# Altium PCB Booster2.PcbDoc (part 1 of 2)
Units mm, origin at the board's own origin, x right, y up, seen from the top; angles counter-clockwise.
Board outline 59.06 x 72.51 mm, 2 copper layers (Top Layer, Bottom Layer); 66 components, 45 nets, 178 pads, 206 vias.
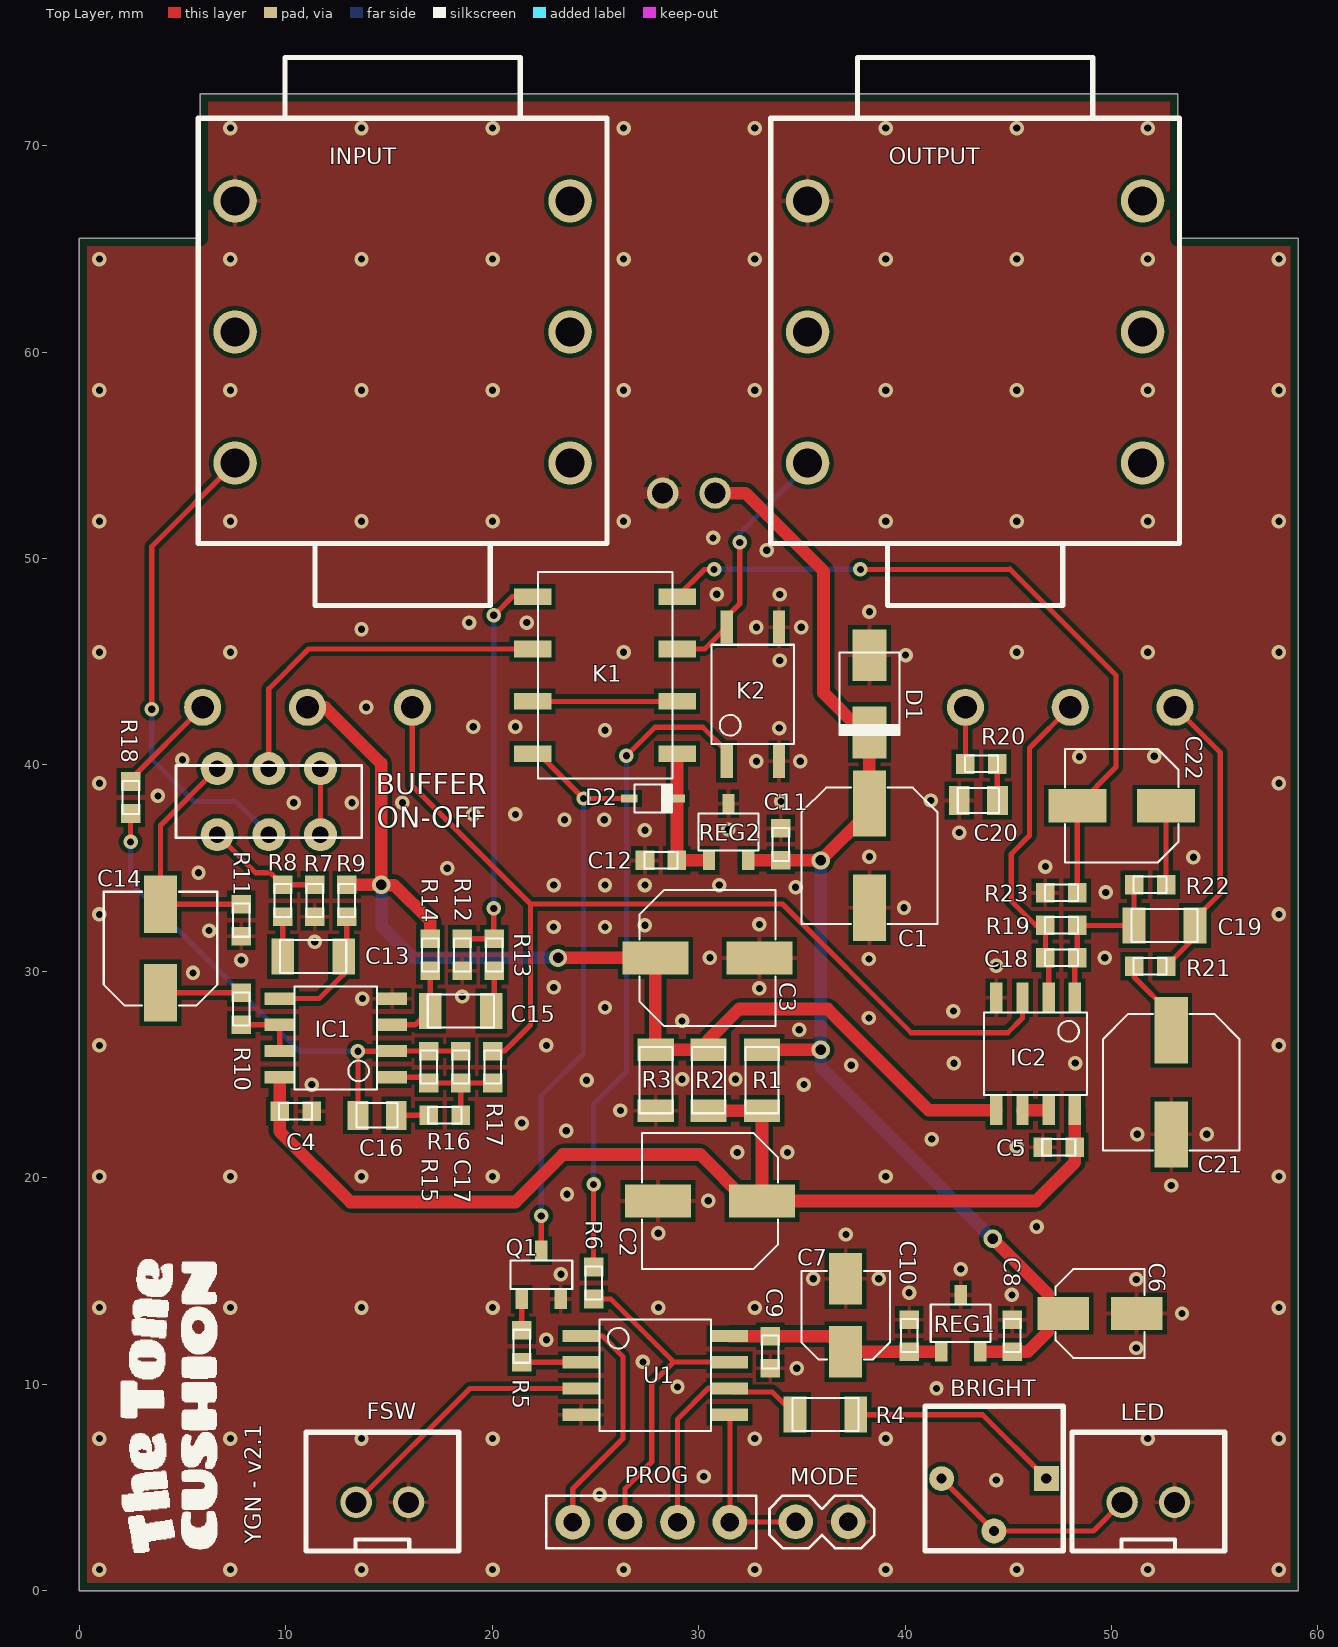
[diagram p0: Top Layer view]
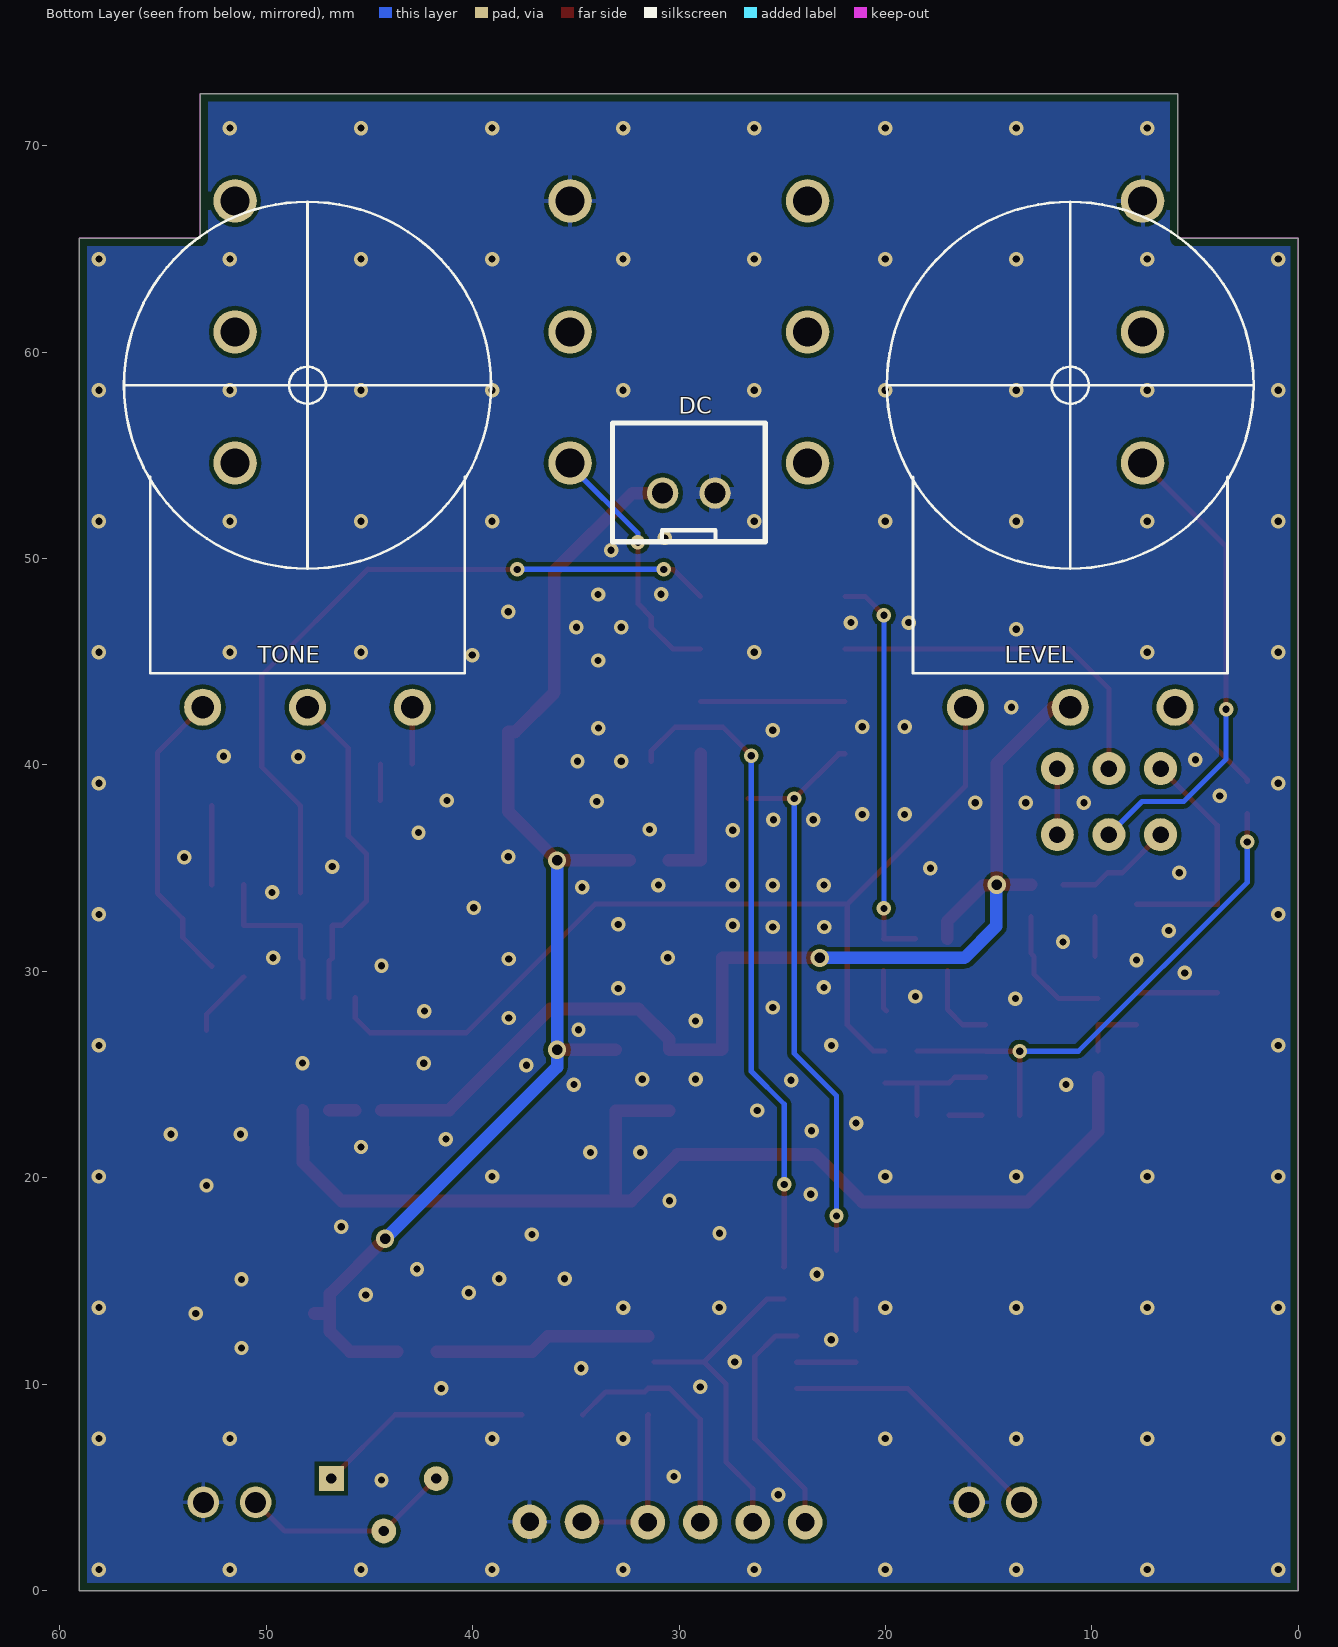
[diagram p1: Bottom Layer view, seen from below]
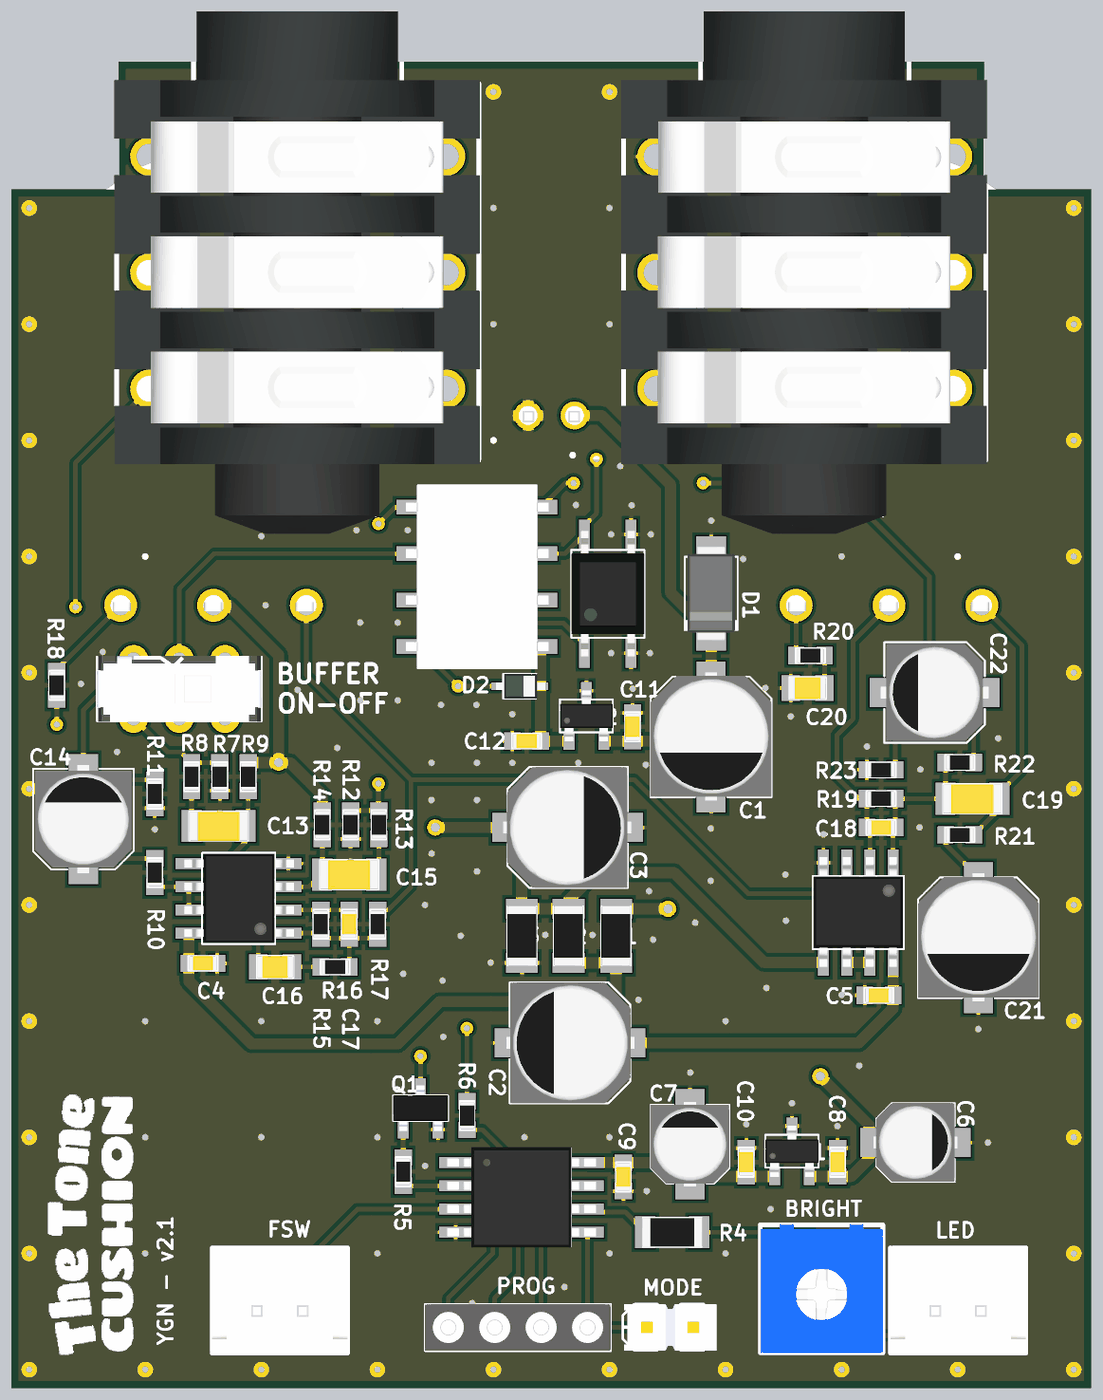
[diagram p2: 3D render of the assembled board from above, using the file's embedded part models]
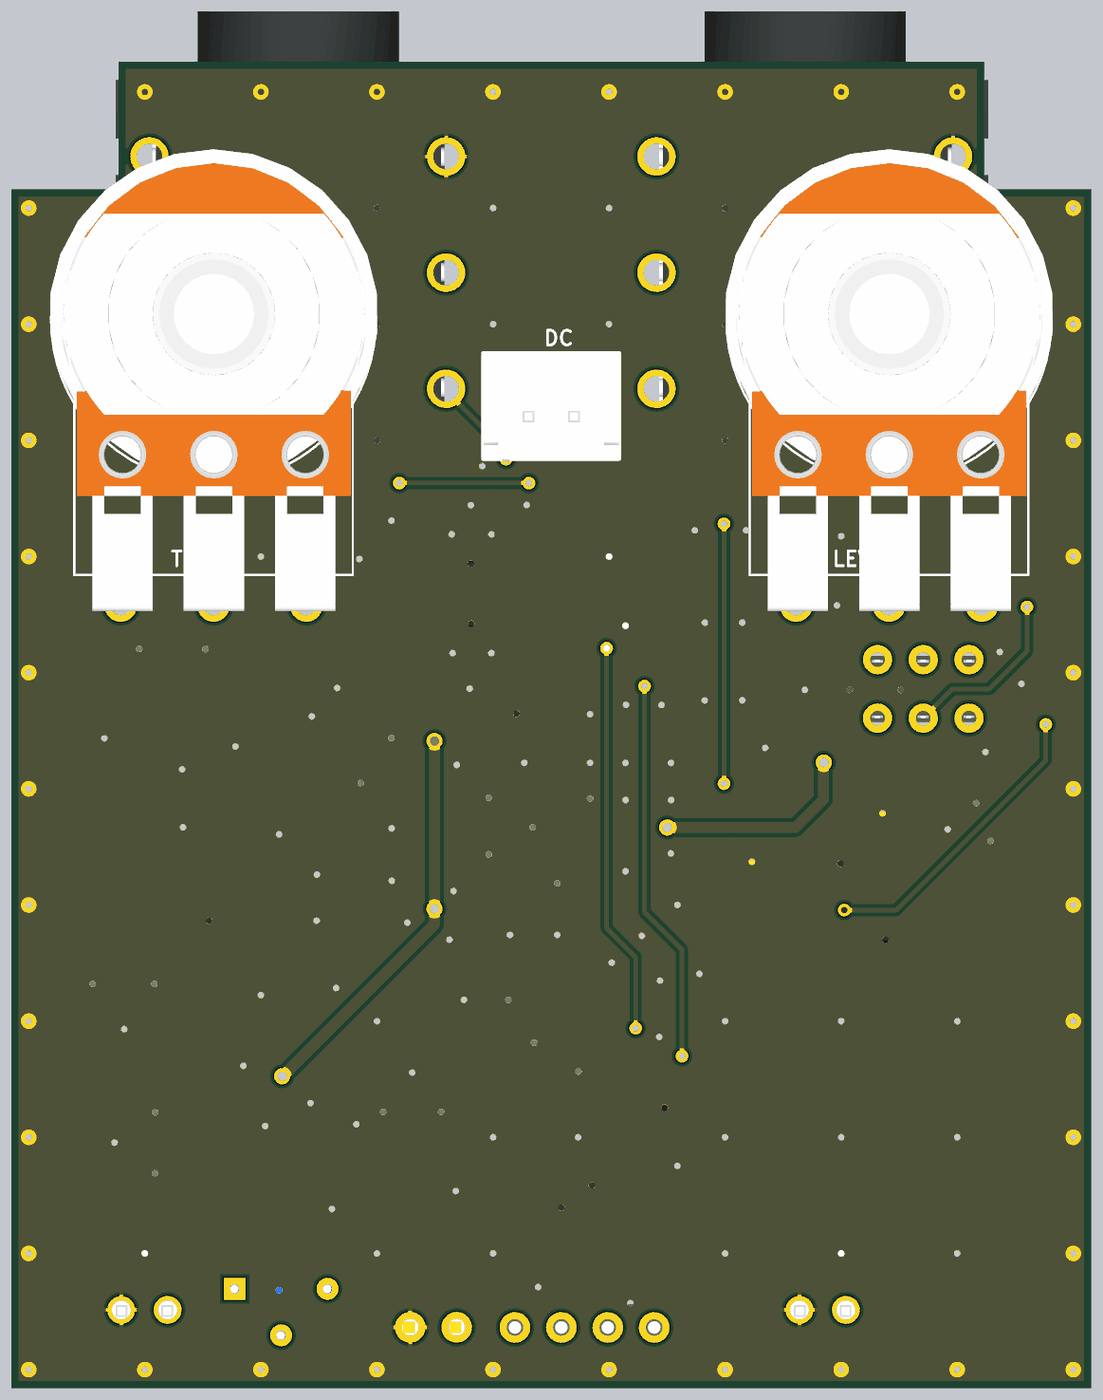
[diagram p3: 3D render of the assembled board from below, using the file's embedded part models]

## Layer stack, top to bottom
Top Solder: solder mask 0.0102, Solder Resist, Dk 3.5
Top Layer: signal copper 0.0356
Dielectric 1: dielectric 0.32, FR-4, Dk 4.8
Bottom Layer: signal copper 0.0356
Bottom Solder: solder mask 0.0102, Solder Resist, Dk 3.5

## Board outline
53.204,72.513 53.204,65.528 59.055,65.528 59.055,0 0,0 0,65.528 5.85,65.528 5.85,72.513

## Design rules (kind name [scope] priority, off if disabled: settings)
BoardOutlineClearance BottomOverlay [OnLayer('Bottom Overlay')] p1: gap=0 ignorepadtopadclearanceinfootprint=FALSE
BoardOutlineClearance TopOverlay [OnLayer('Top Overlay')] p2: gap=0 ignorepadtopadclearanceinfootprint=FALSE
BoardOutlineClearance [All] p3: gap=0.381 ignorepadtopadclearanceinfootprint=FALSE
Clearance [All] p1: gap=0.203 ignorepadtopadclearanceinfootprint=FALSE except(0: Arc-Text Arc-Hole Track-Text Track-Hole SMDPad-Text SMDPad-Hole THPad-Text THPad-Hole Via-Text Via-Hole Fill-Text Fill-Hole Poly-Text Poly-Hole Region-Text Region-Hole Text-Text Text-Hole)
ComponentClearance [All] p1 off: gap=0.025 collisioncheckmode=3 verticalgap=0.025 showdistances=FALSE
DiffPairsRouting [All] p1: maxlimit=10 minlimit=0.152 mostfreqgap=0.203 toplayer_minwidth=0.152 toplayer_maxwidth=0.381 toplayer_prefwidth=0.203 bottomlayer_minwidth=0.152 bottomlayer_maxwidth=0.381 bottomlayer_prefwidth=0.203 maxuncoupledlength=12.7
Height [All] p1 off: minheight=0 maxheight=25.4 prefheight=12.7
HoleSize [All] p1: absolutevalues=TRUE maxlimit=6.731 minlimit=0.3 maxpercent=80.000 minpercent=20.000
HoleToHoleClearance [All] p1: gap=0.254 allowstackedmicrovias=FALSE
MinimumAnnularRing [All] p1: minimumring=0.152
MinimumSolderMaskSliver [All] p1: minsoldermaskwidth=0
PlaneClearance [All] p1: clearance=0.254
PlaneConnect [All] p1: planeconnectstyle=Direct reliefexpansion=0.406 reliefentries=4 reliefconductorwidth=0.152 reliefairgap=0.152
PolygonConnect PolygonConnect_J1 [InComponent ('J1')  Or InComponent ('DC')] p1: connectstyle=Relief reliefconductorwidth=0.61 reliefentries=4 polygonreliefangle="90 Angle" airgapwidth=0.203
PolygonConnect [All] p2: thpad.connectstyle=Relief thpad.reliefconductorwidth=0.203 thpad.reliefentries=4 thpad.polygonreliefangle="90 Angle" thpad.airgapwidth=0.203 smdpad.connectstyle=Relief smdpad.reliefconductorwidth=0.203 smdpad.reliefentries=4 smdpad.polygonreliefangle="90 Angle" smdpad.airgapwidth=0.203 via.connectstyle=Direct via.reliefconductorwidth=0.203 via.reliefentries=4 via.polygonreliefangle="90 Angle" via.airgapwidth=0.203
RoutingCorners [All] p1: cornerstyle=45-Degree minsetback=1.25 maxsetback=1.25
RoutingVias [All] p1: holewidth=0.35 width=0.7 viastyle="Through Hole" minholewidth=0.35 minwidth=0.7 maxholewidth=2.54 maxwidth=2.896
SilkToSilkClearance [All] p1 off: silktosilkclearance=0
SilkToSolderMaskClearance [IsPad] p1 off: minsilkscreentomaskgap=0.152 clearancetoexposedcopper=TRUE
SolderMaskExpansion [All] p1: expansion=0.075
Width [All] p1: maxlimit=0.61 minlimit=0.254 preferedwidth=0.254 minimp=50.000000 maximp=50.000000 favimp=50.000000
19 further rules are at their usual default settings.

## Components (designator, comment, footprint, x,y, rotation, side; value= is the part's Value field where it differs from the comment)
BRIGHT "10kB" BOURNS_3362P 44.316,5.425 r180 top
BUFFER "DPDT" DPDT_SLIDE 4.675,36.475 r0 top
C1 "100u" CAPAE_D 38.275,35.604 r270 top
C2 "100u" CAPAE_D 30.55,18.875 r180 top
C3 "47u" CAPAE_D 30.425,30.65 r0 top
C4 "100n" CHIP_0603 10.475,23.221 r0 top
C5 "100n" CHIP_0603 47.45,21.475 r180 top
C6 "10u" CAPAE_B 49.448,13.423 r0 top
C7 "10u" CAPAE_B 37.125,13.335 r90 top
C8 "100n" CHIP_0603 45.198,12.348 r90 top
C9 "100n" CHIP_0603 33.475,11.55 r270 top
C10 "100n" CHIP_0603 40.198,12.348 r90 top
C11 "100n" CHIP_0603 33.975,36.15 r90 top
C12 "100n" CHIP_0603 28.175,35.375 r180 top
C13 "100n" CHIP_1206 11.325,30.725 r180 top
C14 "4.7u" CAPAE_C 3.925,31.107 r90 top
C15 "100n" CHIP_1206 18.475,28.075 r0 top
C16 "22n" CHIP_0805 14.417,23.025 r180 top
C17 "120p" CHIP_0603 18.475,25.365 r90 top
C18 "120p" CHIP_0603 47.578,30.652 r180 top
C19 "100n" CHIP_1206 52.575,32.225 r0 top
C20 "22n" CHIP_0805 43.554,38.275 r180 top
C21 "10u" CAPAE_D 52.9,24.625 r270 top
C22 "4.7u" CAPAE_C 50.5,38.025 r180 top
D1 "S1A" DO214 38.275,43.45 r90 top
D2 "1N4148WS" SOD323 27.8,38.375 r180 top
DC "J_JST-XH-02" JST-XH-02 29.53,53.175 r180 bottom
FSW "J_JST-XH-02" JST-XH-02 14.677,4.275 r0 top
IC1 "TL072" SO-8 12.425,26.775 r180 top
IC2 "TL072" SO-8 46.325,26 r270 top
INPUT "J_STEREO" STEREO 15.657,60.981 r90 top locked
K1 "G6K" G6K 25.575,44.35 r180 top
K2 "TLP175A" TLP175A 32.625,43.425 r90 top
LED "J_JST-XH-02" JST-XH-02 51.787,4.275 r0 top
LEVEL "500kB" ALPHA_16mm_BOTTOM 11.049,42.779 r180 bottom locked
MODE "J_HEADER_2PINS" HEADER_2PINS 35.975,3.325 r0 top
OUTPUT "J_STEREO" STEREO 43.398,60.981 r90 top locked
PROG "J_HEADER_4PINS_FEM" HEADER_4Pins_FEM 25.165,3.315 r0 top
Q1 "MBT2222A" SOT23 22.375,15.3 r90 top
R1 "47R" CHIP_R_1206 33.075,24.725 r270 top
R2 "47k" CHIP_R_1206 30.475,24.725 r90 top
R3 "47k" CHIP_R_1206 27.925,24.725 r90 top
R4 "220R" CHIP_R_1206 36.143,8.52 r0 top
R5 "20k" CHIP_R_0603 21.425,11.835 r90 top
R6 "1k" CHIP_R_0603 24.925,14.9 r90 top
R7 "2.2M" CHIP_R_0603 11.4,33.425 r90 top
R8 "10k" CHIP_R_0603 9.85,33.425 r270 top
R9 "2.2M" CHIP_R_0603 12.95,33.425 r90 top
R10 "1k" CHIP_R_0603 7.838,28.185 r90 top
R11 "100k" CHIP_R_0603 7.838,32.478 r90 top
R12 "2.2M" CHIP_R_0603 18.55,30.8 r90 top
R13 "10k" CHIP_R_0603 20.1,30.8 r270 top
R14 "2.2M" CHIP_R_0603 17,30.8 r90 top
R15 "330k" CHIP_R_0603 16.925,25.365 r270 top
R16 "100k" CHIP_R_0603 17.7,23.025 r0 top
R17 "47k" CHIP_R_0603 20.025,25.365 r90 top
R18 "20k" CHIP_R_0603 2.475,38.425 r90 top
R19 "20k" CHIP_R_0603 47.575,32.227 r0 top
R20 "3.3k" CHIP_R_0603 43.7,40.05 r180 top
R21 "3.3k" CHIP_R_0603 51.875,30.25 r180 top
R22 "1k" CHIP_R_0603 51.875,34.2 r0 top
R23 "100k" CHIP_R_0603 47.575,33.8 r0 top
REG1 "78L05" SOT23-3 42.698,12.948 r90 top
REG2 "78L05" SOT23-3 31.45,36.75 r90 top
TONE "100kB" ALPHA_16mm_BOTTOM 48.006,42.779 r180 bottom locked
U1 "ATTINY85" SOP8 27.9,10.425 r0 top

## Footprints (in the part's own frame and the unit in brackets; to place one, negate y for a bottom-side part, rotate by r counter-clockwise, add the part's x,y. Pads: shape width x height; smd on the part's side, far side on the other; paste and mask are expansions set on the pad)
ALPHA_16mm_BOTTOM [mm]
  round 1.8 hole 1.1: 1(-5.08,0.016) 2(0,0.016) 3(5.08,0.016)
  silkscreen extent -8.89,1.67 8.89,24.51, body extent -8.99,-0.31 11.3,24.95, height 27.09
BOURNS_3362P [mm]
  rect 1.2x1.2 hole 0.5: 1(-2.534,0)
  round 1.2 hole 0.5: 2(0.006,2.54) 3(2.546,0)
  silkscreen extent -3.35,-3.51 3.35,3.49, body extent -3.35,-3.53 3.35,3.51, height 4.88
CAPAE_B [mm] "Aluminum Electrolytic Capacitor, Body 4.30x4.30x5.40mm, IPC Low Density"
  rect 2.5x1.6 smd: +(-1.772,0) -(1.772,0)
  silkscreen extent -2.15,-2.15 2.15,2.15, body extent -2.3,-2.14 2.3,2.16, height 5.41
CAPAE_C [mm] "Aluminum Electrolytic Capacitor, Body 5.30x5.30x5.40mm, IPC Low Density"
  rect 2.8x1.6 smd: +(-2.147,0) -(2.147,0)
  silkscreen extent -2.75,-2.75 2.75,2.75, body extent -2.95,-2.65 2.95,2.65, height 5.41
CAPAE_D [mm] "Aluminum Electrolytic Capacitor, Body 6.60x6.60x5.40mm, IPC Low Density"
  rect 3.2x1.6 smd: +(-2.521,0) -(2.521,0)
  silkscreen extent -3.3,-3.3 3.3,3.3, body extent -3.53,-3.3 3.47,3.3, height 5.41
CHIP_0603 [mm] "Chip Capacitor, 2-Leads, Body 1.60x0.80mm, IPC Medium Density"
  rect 0.9x0.95 smd: 1(-0.775,0) 2(0.775,0)
  silkscreen extent -0.8,-0.4 0.8,0.4, body extent -0.75,-0.4 0.75,0.4, height 0.65
CHIP_0805 [mm] "Chip Capacitor, 2-Leads, Body 2.00x1.25mm, IPC Medium Density"
  rect 1x1.4 smd: 1(-0.925,0) 2(0.925,0)
  silkscreen extent -1,-0.6 1,0.6, body extent -1,-0.6 1,0.6, height 0.7
CHIP_1206 [mm] "Chip Capacitor, 2-Leads, Body 3.20x1.60mm, IPC Medium Density"
  rect 1.1x1.75 smd: 1(-1.475,0) 2(1.475,0)
  silkscreen extent -1.6,-0.8 1.6,0.8, body extent -1.6,-0.8 1.6,0.8, height 1.05
CHIP_R_0603 [mm] "Chip Resistor, 2-Leads, Body 1.60x0.80mm, IPC Medium Density"
  rect 0.9x0.95 smd: 1(-0.775,0) 2(0.775,0)
  silkscreen extent -0.8,-0.4 0.8,0.4, body extent -0.75,-0.4 0.75,0.4, height 0.63
CHIP_R_1206 [mm] "Chip Resistor 2-Leads, Body 3.20x1.60mm, IPC Medium Density"
  rect 1.1x1.75 smd: 1(-1.475,0) 2(1.475,0)
  silkscreen extent -1.6,-0.8 1.6,0.8, body extent -1.65,-0.8 1.65,0.8, height 0.76
DO214 [mm] "Molded Diode, 2-Leads, Body 4.30x2.63mm, IPC Medium Density"
  rect 2.5x1.65 smd: 1(-1.875,0) 2(1.875,0)
  silkscreen extent -2,-1.45 2,1.45, body extent -2.6,-1.3 2.6,1.3, height 2.4
DPDT_SLIDE [mm]
  round 1.6 hole 0.8: A1(2,3.35) A2(4.5,3.35) A3(7,3.35) B1(2,0.15) B2(4.5,0.15) B3(7,0.15)
  silkscreen extent 0,0 9,3.5, body extent 0,-0.05 9,3.55, height 5.5
G6K [mm]
  rect 1.8x0.8 smd: 1(-3.386,3.81) 2(-3.386,1.27) 3(-3.386,-1.27) 4(-3.386,-3.81) 5(3.614,-3.81) 6(3.614,-1.27) 7(3.614,1.27) 8(3.614,3.81)
  silkscreen extent -3.15,-5 3.35,5, body extent -3.8,-5 4,5, height 5.2
HEADER_2PINS [mil]
  round 66 hole 35.43: 1(50,0) 2(-50,0)
  silkscreen extent -100,-50 100,50, body extent -102,-50 102,50, height 330
HEADER_4Pins_FEM [mil]
  round 66 hole 35.43: 1(-50,0) 2(50,0) 3(150,0) 4(250,0)
  silkscreen extent -100,-50 300,50, body extent -100,-50 300,50, height 237
JST-XH-02 [mil]
  round 60 hole 40: 1(-50,0) 2(50,0)
  silkscreen extent -146,-93 146,134, body extent -146,-95 146,131, height 276
SO-8 [mm] "SOIC, 8-Leads, Body 4.90x3.90mm, Pitch 1.27mm, IPC Medium Density"
  rect 1.45x0.6 smd: 1(-2.725,1.905) 2(-2.725,0.635) 3(-2.725,-0.635) 4(-2.725,-1.905) 5(2.725,-1.905) 6(2.725,-0.635) 7(2.725,0.635) 8(2.725,1.905)
  silkscreen extent -2,-2.5 2,2.5, body extent -3.02,-2.45 2.98,2.45, height 1.75
SOD323 [mm] "SODFL, 2-Leads, Body 1.25x2.50mm, IPC Medium Density"
  rect 0.8x0.4 smd: 1(-1.15,0) 2(1.15,0)
  silkscreen extent -0.9,-0.67 0.9,0.67, body extent -1.4,-0.68 1.3,0.67, height 0.79
SOP8 [mm] "SOP, 8-Leads, Body 5.24x5.29mm, Pitch 1.27mm, IPC Medium Density"
  rect 1.8x0.6 smd: 1(-3.6,1.905) 2(-3.6,0.635) 3(-3.6,-0.635) 4(-3.6,-1.905) 5(3.6,-1.905) 6(3.6,-0.635) 7(3.6,0.635) 8(3.6,1.905)
  silkscreen extent -2.7,-2.7 2.7,2.7, body extent -4.07,-2.74 4.07,2.74, height 1.9
SOT23 [mm] "SOT23, 3-Leads, Body 2.90x2.35mm, Pitch 0.95mm, IPC Medium Density"
  rect 0.95x0.6 smd: 1(-1.175,0.95) 2(-1.175,-0.95) 3(1.175,0)
  silkscreen extent -0.7,-1.5 0.7,1.5, body extent -1.25,-1.5 1.25,1.5, height 1.05
SOT23-3 [mm] "SOT23, 3-Leads, Body 2.80x2.80mm, Pitch 0.95mm, IPC Medium Density"
  rect 0.95x0.6 smd: 1(-1.375,0.95) 2(-1.375,-0.95) 3(1.375,0)
  silkscreen extent -0.9,-1.45 0.9,1.45, body extent -1.4,-1.45 1.4,1.45, height 1.3
STEREO [mm]
  round 2.1 hole 1.4: R(0,8.115) RN(0,-8.115) S(6.35,8.115) SN(6.35,-8.115) T(-6.35,8.115) TN(-6.35,-8.115)
  silkscreen extent -13.25,-9.91 13.3,9.91, body extent -14.28,-9.97 14.28,10.03, height 15.5
TLP175A [mm] "SOP, 4-Leads, Body 3.75x4.60mm, Pitch 2.54mm, IPC Medium Density"
  rect 1.6x0.6 smd: 1(-3.25,1.27) 3(-3.25,-1.27) 4(3.25,-1.27) 6(3.25,1.27)
  silkscreen extent -2.4,-2 2.4,2, body extent -3.43,-2 3.43,2, height 2.02

## Part data
BRIGHT: library part TRIM_10kB_3362P, "10k Lin 3362P trimmer", Price=0.1
BUFFER: library part SW_SLIDE_DPDT_ON-ON, "DPDT slide switch ON/ON", Price=0.5
C1 C2: library part MCVVT025M101EA6L, "CAP ALUM 100UF 25V SMD", Capacitance=100uF, Manufacturer=Multicomp, Max Operating Temperature=105°C, Min Operating Temperature=-55°C, Ripple Current (AC)=6.3mA, Supplier Part Number 1=2611370, Voltage Rating=25V, ComponentLink1Description=http://www.farnell.com/datasheets/2151198.pdf?src-supplier=Element14, ComponentLink1URL=http://www.farnell.com/datasheets/2151198.pdf?src-supplier=Element14, Diameter=6.3mm, Height=7.7mm, Life (Hours)=2000Hour, Manufacturer Part Number=MCVVT025M101EA6L, Packaging="Tape and Reel", Price=0.102, Pricing="1=0.157, 50=0.104, 100=0.0932, 250=0.0801, 500=0.0681 (EUR)", REACH SVHC="No SVHC", RoHS=No, Stock=1063, Supplier 1=Farnell, Voltage Rating (DC)=25V
C3: library part MCVVT025M470EA1L, "CAP ALUM 47UF 25V SMD", Capacitance=47uF, Manufacturer=Multicomp, Max Operating Temperature=105°C, Min Operating Temperature=-55°C, Ripple Current (AC)=6.3mA, Supplier Part Number 1=2611377, Voltage Rating=25V, ComponentLink1Description=http://www.farnell.com/datasheets/2151198.pdf?src-supplier=Farnell, ComponentLink1URL=http://www.farnell.com/datasheets/2151198.pdf?src-supplier=Farnell, ComponentLink2Description=http://www.farnell.com/datasheets/2151198.pdf?src-supplier=Element14, ComponentLink2URL=http://www.farnell.com/datasheets/2151198.pdf?src-supplier=Element14, Diameter=6.3mm, Height=5.4mm, Life (Hours)=2000Hour, Manufacturer Part Number=MCVVT025M470EA1L, Packaging="Cut Tape", Price=0.0825, Pricing="1=0.125, 50=0.0825, 100=0.0741, 250=0.0637, 500=0.0542 (EUR)", REACH SVHC="No SVHC", RoHS=No, Stock=1436, Supplier 1=Farnell, Voltage Rating (DC)=25V
C4 C5 C8 C9 C10 C11 C12: library part MC0603B104K500CT, "CAP CER 100NF 50V X7R 0603", Capacitance=100nF, Case/Package=0603, Case Code (Metric)=1608, Dielectric=X7R, Manufacturer=Multicomp, Max Operating Temperature=125°C, Min Operating Temperature=-55°C, Supplier Part Number 1=1759122, Tolerance=10%, Voltage Rating=50V, Case Code (Imperial)=0603, ComponentLink1Description=https://datasheet.ciiva.com/22686/1901289-22686278.pdf?src-supplier=Element14, ComponentLink1URL=https://datasheet.ciiva.com/22686/1901289-22686278.pdf?src-supplier=Element14, ComponentLink2Description=https://datasheet.ciiva.com/22686/1901289-22686279.pdf?src-supplier=Element14, ComponentLink2URL=https://datasheet.ciiva.com/22686/1901289-22686279.pdf?src-supplier=Element14, ComponentLink3Description=https://datasheet.ciiva.com/22648/1901289-22648411.pdf?src-supplier=Element14, ComponentLink3URL=https://datasheet.ciiva.com/22648/1901289-22648411.pdf?src-supplier=Element14, Manufacturer Part Number=MC0603B104K500CT, Number of Pins=2, Packaging="Cut Tape", Price=0.0458, REACH SVHC=Unknown, RoHS=Yes, Stock 1=1057763, Supplier 1=Farnell, Voltage Rating (DC)=50V
C6 C7: library part MCVVT025M100CA1L, "CAP ALUM 10UF 25V SMD", Capacitance=10uF, Manufacturer=Multicomp, Max Operating Temperature=105°C, Min Operating Temperature=-55°C, Ripple Current (AC)=4mA, Supplier Part Number 1=2611368, Voltage Rating=25V, ComponentLink1Description=http://www.farnell.com/datasheets/2151198.pdf?src-supplier=Element14, ComponentLink1URL=http://www.farnell.com/datasheets/2151198.pdf?src-supplier=Element14, Diameter=4mm, Height=5.4mm, Life (Hours)=2000Hour, Manufacturer Part Number=MCVVT025M100CA1L, Packaging="Cut Tape", Price=0.0592, Pricing="5=0.0897, 50=0.0592, 250=0.0457, 500=0.0388, 1000=0.0338 (EUR)", REACH SVHC="No SVHC", RoHS=No, Stock=2773, Supplier 1=Farnell, Voltage Rating (DC)=25V
C13 C15 C19: library part GRM31C5C1H104JA01L, "CAP CER 100NF 50V C0G/NP0 1206", Capacitance=100nF, Case/Package=1206, Case Code (Metric)=3216, Dielectric=C0G, Manufacturer=Murata, Max Operating Temperature=125°C, Min Operating Temperature=-55°C, Package Quantity=1, Supplier Part Number 1=2494294, Temperature Coefficient=30ppm/°C, Tolerance=5%, Voltage=50V, Case Code (Imperial)=1206, ComponentLink1Description=https://datasheet.ciiva.com/11618/product-11618880.pdf?src-supplier=Avnet, ComponentLink1URL=https://datasheet.ciiva.com/11618/product-11618880.pdf?src-supplier=Avnet, ComponentLink2Description=https://datasheet.ciiva.com/29200/453430-da-01-en-vs-kondensator-1206-29200201.pdf?src-supplier=Conrad, ComponentLink2URL=https://datasheet.ciiva.com/29200/453430-da-01-en-vs-kondensator-1206-29200201.pdf?src-supplier=Conrad, ComponentLink3Description=https://datasheet.ciiva.com/5420/product-5420070.pdf?src-supplier=Mouser, ComponentLink3URL=https://datasheet.ciiva.com/5420/product-5420070.pdf?src-supplier=Mouser, ComponentLink4Description=https://datasheet.ciiva.com/16461/product-16461275.pdf?src-supplier=Future+Electronics, ComponentLink4URL=https://datasheet.ciiva.com/16461/product-16461275.pdf?src-supplier=Future+Electronics, ComponentLink5Description=https://datasheet.ciiva.com/6270/partnumbering-e-01-6270255.pdf?src-supplier=Digi-Key, ComponentLink5URL=https://datasheet.ciiva.com/6270/partnumbering-e-01-6270255.pdf?src-supplier=Digi-Key, Depth=1.6mm, Height=1.6mm, Lead Free="Lead Free", Length=3.2mm, Manufacturer Part Number=GRM31C5C1H104JA01L, Material=Ceramic, Mount="Surface Mount", Packaging="Tape and Reel", Price=0.31, Pricing 1="5 = 0.62500, 50 = 0.31000, 250 = 0.29700, 500 = 0.22200, 1000 = 0.18900 (EUR)", Radiation Hardening=No, REACH SVHC="No SVHC", RoHS=Yes, Stock 1=206865, Supplier 1=Farnell, Termination=SMD/SMT, Thickness=0.071inch, Voltage Rating=50V, Voltage Rating (DC)=50V, Weight=0.000571oz, Width=0.063inch
C14 C22: library part EEEFC1H4R7R, "CAP ALUM 4.7UF 50V LESR SMD", Capacitance=4.7uF, Case/Package=Radial, Dielectric Material=Aluminium, ESR (Equivalent Series Resistance)=3R, Leakage Current=3uA, Manufacturer=Panasonic, Max Operating Temperature=105°C, Min Operating Temperature=-40°C, Package Quantity=1, Ripple Current=50mA, Supplier Part Number 1=9694552, Tolerance=20%, Voltage=50V, ComponentLink1Description=https://datasheet.ciiva.com/11778/0900766b806bc525-11778368.pdf?src-supplier=RSComponents, ComponentLink1URL=https://datasheet.ciiva.com/11778/0900766b806bc525-11778368.pdf?src-supplier=RSComponents, ComponentLink2Description=https://datasheet.ciiva.com/6196/31718-6196262.pdf?src-supplier=Farnell, ComponentLink2URL=https://datasheet.ciiva.com/6196/31718-6196262.pdf?src-supplier=Farnell, ComponentLink3Description=https://datasheet.ciiva.com/30150/aba0000ce5-30150534.pdf?src-supplier=Onlinecomponents.com, ComponentLink3URL=https://datasheet.ciiva.com/30150/aba0000ce5-30150534.pdf?src-supplier=Onlinecomponents.com, ComponentLink4Description=https://datasheet.ciiva.com/48542/eeefc-series-eng-tds-48542743.pdf?src-supplier=Distrelec, ComponentLink4URL=https://datasheet.ciiva.com/48542/eeefc-series-eng-tds-48542743.pdf?src-supplier=Distrelec, ComponentLink5Description=https://datasheet.ciiva.com/14595/70256381-14595032.pdf?src-supplier=Allied+Electronics, ComponentLink5URL=https://datasheet.ciiva.com/14595/70256381-14595032.pdf?src-supplier=Allied+Electronics, ComponentLink6Description=https://datasheet.ciiva.com/43485/31718-43485416.pdf?src-supplier=Farnell, ComponentLink6URL=https://datasheet.ciiva.com/43485/31718-43485416.pdf?src-supplier=Farnell, ComponentLink7Description=https://datasheet.ciiva.com/24072/aba0000ce5-68492-24072137.pdf?src-supplier=Mouser, ComponentLink7URL=https://datasheet.ciiva.com/24072/aba0000ce5-68492-24072137.pdf?src-supplier=Mouser, ComponentLink8Description=https://datasheet.ciiva.com/14602/70256381-14602202.pdf?src-supplier=Allied+Electronics, ComponentLink8URL=https://datasheet.ciiva.com/14602/70256381-14602202.pdf?src-supplier=Allied+Electronics, ComponentLink9Description=https://datasheet.ciiva.com/46376/31718-46376378.pdf?src-supplier=Element14, ComponentLink9URL=https://datasheet.ciiva.com/46376/31718-46376378.pdf?src-supplier=Element14, ComponentLink10Description=https://datasheet.ciiva.com/14596/70068018-14596798.pdf?src-supplier=Allied+Electronics, ComponentLink10URL=https://datasheet.ciiva.com/14596/70068018-14596798.pdf?src-supplier=Allied+Electronics, Contact Plating=Tin, Diameter=5mm, Height=5.4mm, Height - Seated (Max)=0.213inch, Impedance=3R, Lead Free="Lead Free", Lead Length=2.2mm, Lead Pitch=1.5mm, Length=5.5mm, Life (Hours)=1000Hour, Manufacturer Part Number=EEEFC1H4R7R, Mount="Surface Mount", Number of Pins=2, Packaging="Tape and Reel", Price=0.27, Pricing 1="1 = 0.26900, 50 = 0.18200, 100 = 0.14200, 250 = 0.13200, 500 = 0.09890 (EUR)", Radiation Hardening=No, REACH SVHC="No SVHC", Ripple Current (AC)=50mA, RoHS=Yes, Stock 1=1971, Supplier 1=Farnell, Termination=SMD/SMT, Voltage Rating=50V, Voltage Rating (DC)=50V, Width=5.3mm
C16 C20: library part GRM21B5C1H223JA01L, "CAP CER 22NF 50V C0G/NP0 0805", Capacitance=22nF, Case/Package=0805, Case Code (Metric)=2012, Dielectric=C0G, Manufacturer=Murata, Max Operating Temperature=125°C, Min Operating Temperature=-55°C, Package Quantity=1, Supplier Part Number 1=1828943, Temperature Coefficient=30ppm/°C, Tolerance=5%, Voltage=25V, Voltage Rating=50V, Case Code (Imperial)=0805, ComponentLink1Description=https://datasheet.ciiva.com/2989/product-2989681.pdf?src-supplier=Avnet, ComponentLink1URL=https://datasheet.ciiva.com/2989/product-2989681.pdf?src-supplier=Avnet, ComponentLink2Description=https://datasheet.ciiva.com/29042/1858738-29042965.pdf?src-supplier=Jameco, ComponentLink2URL=https://datasheet.ciiva.com/29042/1858738-29042965.pdf?src-supplier=Jameco, ComponentLink3Description=https://datasheet.ciiva.com/3777/99grm21b5c1h223ja0123-3777023.pdf?src-supplier=Arrow, ComponentLink3URL=https://datasheet.ciiva.com/3777/99grm21b5c1h223ja0123-3777023.pdf?src-supplier=Arrow, ComponentLink4Description=https://datasheet.ciiva.com/29200/453051-da-01-en-vs-kondensator-0805-29200670.pdf?src-supplier=Conrad, ComponentLink4URL=https://datasheet.ciiva.com/29200/453051-da-01-en-vs-kondensator-0805-29200670.pdf?src-supplier=Conrad, ComponentLink5Description=https://datasheet.ciiva.com/138/partnumbering-e-01-138787.pdf?src-supplier=Digi-Key, ComponentLink5URL=https://datasheet.ciiva.com/138/partnumbering-e-01-138787.pdf?src-supplier=Digi-Key, ComponentLink6Description=https://datasheet.ciiva.com/138/partnumbering-e-01-138789.pdf?src-supplier=Digi-Key, ComponentLink6URL=https://datasheet.ciiva.com/138/partnumbering-e-01-138789.pdf?src-supplier=Digi-Key, ComponentLink7Description=https://datasheet.ciiva.com/22703/608985-22703464.pdf?src-supplier=Element14, ComponentLink7URL=https://datasheet.ciiva.com/22703/608985-22703464.pdf?src-supplier=Element14, ComponentLink8Description=https://datasheet.ciiva.com/7828/608985-7828990.pdf?src-supplier=Element14, ComponentLink8URL=https://datasheet.ciiva.com/7828/608985-7828990.pdf?src-supplier=Element14, ComponentLink9Description=https://datasheet.ciiva.com/138/partnumbering-e-01-138788.pdf?src-supplier=Digi-Key, ComponentLink9URL=https://datasheet.ciiva.com/138/partnumbering-e-01-138788.pdf?src-supplier=Digi-Key, Depth=1.25mm, Height=1.25mm, Lead Free="Lead Free", Length=2mm, Manufacturer Part Number=GRM21B5C1H223JA01L, Material=Ceramic, Mount="Surface Mount", Number of Pins=2, Packaging="Tape and Reel", Price=0.191, Pricing 1="5 = 0.38000, 50 = 0.19100, 250 = 0.16400, 500 = 0.10400, 1500 = 0.08380 (EUR)", Radiation Hardening=No, REACH SVHC="No SVHC", RoHS=Yes, Stock 1=85144, Supplier 1=Farnell, Termination=SMD/SMT, Thickness=0.053inch, Voltage Rating (DC)=50V, Width=0.049inch
C17 C18: library part MC0603N121J500CT, "CAP CER 120PF 50V C0G/NP0 0603", Capacitance=120pF, Case/Package=0603, Case Code (Metric)=1608, Dielectric=C0G, Manufacturer=Multicomp, Max Operating Temperature=125°C, Min Operating Temperature=-55°C, Supplier Part Number 1=1759067, Temperature Coefficient=30ppm/°C, Tolerance=5%, Voltage Rating=50V, Case Code (Imperial)=0603, ComponentLink1Description=https://datasheet.ciiva.com/7751/ta-1098-7751430.pdf?src-supplier=Element14, ComponentLink1URL=https://datasheet.ciiva.com/7751/ta-1098-7751430.pdf?src-supplier=Element14, ComponentLink2Description=https://datasheet.ciiva.com/22648/1901289-22648473.pdf?src-supplier=Element14, ComponentLink2URL=https://datasheet.ciiva.com/22648/1901289-22648473.pdf?src-supplier=Element14, ComponentLink3Description=https://datasheet.ciiva.com/22648/1901289-22648474.pdf?src-supplier=Element14, ComponentLink3URL=https://datasheet.ciiva.com/22648/1901289-22648474.pdf?src-supplier=Element14, ComponentLink4Description=https://datasheet.ciiva.com/41653/ta-1098-41653965.pdf?src-supplier=Farnell, ComponentLink4URL=https://datasheet.ciiva.com/41653/ta-1098-41653965.pdf?src-supplier=Farnell, Manufacturer Part Number=MC0603N121J500CT, Number of Pins=2, Packaging="Cut Tape", Price=0.0246, Pricing="10=0.0363, 100=0.0246, 500=0.0182, 1000=0.0144, 2000=0.0119 (EUR)", REACH SVHC=Unknown, RoHS=Yes, Stock=19090, Supplier 1=Farnell, Voltage Rating (DC)=50V, Width=0.8mm
C21: library part EEEFC1H100P, "CAP ALUM 10UF 20% 50V LESR SMD", Capacitance=10uF, Case/Package=Radial, Dielectric Material=Aluminium, ESR (Equivalent Series Resistance)=2R, Leakage Current=3uA, Manufacturer=Panasonic, Max Operating Temperature=105°C, Min Operating Temperature=-40°C, Package Quantity=1000, Ripple Current=70mA, Supplier Part Number 1=9694560, Tolerance=20%, Voltage=50V, ComponentLink1Description=https://datasheet.ciiva.com/11777/0900766b80e4a876-11777374.pdf?src-supplier=RSComponents, ComponentLink1URL=https://datasheet.ciiva.com/11777/0900766b80e4a876-11777374.pdf?src-supplier=RSComponents, ComponentLink2Description=https://datasheet.ciiva.com/25613/0900766b806bc525-25613719.pdf?src-supplier=RSComponents, ComponentLink2URL=https://datasheet.ciiva.com/25613/0900766b806bc525-25613719.pdf?src-supplier=RSComponents, ComponentLink3Description=https://datasheet.ciiva.com/43485/31718-43485417.pdf?src-supplier=Farnell, ComponentLink3URL=https://datasheet.ciiva.com/43485/31718-43485417.pdf?src-supplier=Farnell, ComponentLink4Description=https://datasheet.ciiva.com/43463/31718-43463467.pdf?src-supplier=Farnell, ComponentLink4URL=https://datasheet.ciiva.com/43463/31718-43463467.pdf?src-supplier=Farnell, ComponentLink5Description=https://datasheet.ciiva.com/46376/31718-46376383.pdf?src-supplier=Element14, ComponentLink5URL=https://datasheet.ciiva.com/46376/31718-46376383.pdf?src-supplier=Element14, ComponentLink6Description=https://datasheet.ciiva.com/14603/70256381-14603525.pdf?src-supplier=Allied+Electronics, ComponentLink6URL=https://datasheet.ciiva.com/14603/70256381-14603525.pdf?src-supplier=Allied+Electronics, ComponentLink7Description=https://datasheet.ciiva.com/16394/aba0000ce5-16394405.pdf?src-supplier=Future+Electronics, ComponentLink7URL=https://datasheet.ciiva.com/16394/aba0000ce5-16394405.pdf?src-supplier=Future+Electronics, ComponentLink8Description=https://datasheet.ciiva.com/48542/eeefc-series-eng-tds-48542742.pdf?src-supplier=Distrelec, ComponentLink8URL=https://datasheet.ciiva.com/48542/eeefc-series-eng-tds-48542742.pdf?src-supplier=Distrelec, ComponentLink9Description=https://datasheet.ciiva.com/24069/aba0000ce5-68492-24069287.pdf?src-supplier=Mouser, ComponentLink9URL=https://datasheet.ciiva.com/24069/aba0000ce5-68492-24069287.pdf?src-supplier=Mouser, ComponentLink10Description=https://datasheet.ciiva.com/14588/70068018-14588537.pdf?src-supplier=Allied+Electronics, ComponentLink10URL=https://datasheet.ciiva.com/14588/70068018-14588537.pdf?src-supplier=Allied+Electronics, ComponentLink11Description=https://datasheet.ciiva.com/6121/31718-6121404.pdf?src-supplier=Farnell, ComponentLink11URL=https://datasheet.ciiva.com/6121/31718-6121404.pdf?src-supplier=Farnell, ComponentLink12Description=https://datasheet.ciiva.com/46388/31718-46388044.pdf?src-supplier=Element14, ComponentLink12URL=https://datasheet.ciiva.com/46388/31718-46388044.pdf?src-supplier=Element14, ComponentLink13Description=https://datasheet.ciiva.com/30236/aba0000ce5-30236333.pdf?src-supplier=Onlinecomponents.com, ComponentLink13URL=https://datasheet.ciiva.com/30236/aba0000ce5-30236333.pdf?src-supplier=Onlinecomponents.com, ComponentLink14Description=https://datasheet.ciiva.com/46388/31718-46388045.pdf?src-supplier=Element14, ComponentLink14URL=https://datasheet.ciiva.com/46388/31718-46388045.pdf?src-supplier=Element14, ComponentLink15Description=https://datasheet.ciiva.com/16539/aba0000ce5-16539967.pdf?src-supplier=Avnet+Asia, ComponentLink15URL=https://datasheet.ciiva.com/16539/aba0000ce5-16539967.pdf?src-supplier=Avnet+Asia, Diameter=6.3mm, Height=5.4mm, Height - Seated (Max)=0.213inch, Impedance=2R, Lead Free="Lead Free", Lead Length=2.6mm, Lead Pitch=1.8mm, Length=5.5mm, Life (Hours)=1000Hour, Manufacturer Part Number=EEEFC1H100P, Material=Aluminium, Mount="Surface Mount", Number of Pins=2, Packaging="Tape and Reel", Polarity=Polar, Price=0.174, Pricing="1=0.369, 50=0.219, 100=0.16, 250=0.156, 500=0.118 (EUR)", Radiation Hardening=No, REACH SVHC="No SVHC", Ripple Current (AC)=70mA, RoHS=Yes, Stock=7178, Supplier 1=Farnell, Termination=SMD/SMT, Voltage Rating=50V, Voltage Rating (DC)=50V, Width=6.6mm
D1: "DIODE GEN PURP 50V 1A SMA", Average Rectified Current=1A, Capacitance=12pF, Case/Package=SMA, Forward Voltage=1.1V, Manufacturer="ON Semiconductor / Fairchild", Max Forward Surge Current (Ifsm)=30A, Max Operating Temperature=150°C, Max Repetitive Reverse Voltage (Vrrm)=50V, Max Surge Current=40A, Min Operating Temperature=-55°C, Package Quantity=1, Peak Reverse Current=1uA, Power Dissipation=1.4W, Supplier Part Number 1=9843868, ComponentLink1Description=https://datasheet.ciiva.com/910/s1a-910480.pdf?src-supplier=Avnet, ComponentLink1URL=https://datasheet.ciiva.com/910/s1a-910480.pdf?src-supplier=Avnet, ComponentLink2Description=https://datasheet.ciiva.com/23683/1730038-23683616.pdf?src-supplier=Newark, ComponentLink2URL=https://datasheet.ciiva.com/23683/1730038-23683616.pdf?src-supplier=Newark, ComponentLink3Description=https://datasheet.ciiva.com/4452/s1a-191336-4452662.pdf?src-supplier=Mouser, ComponentLink3URL=https://datasheet.ciiva.com/4452/s1a-191336-4452662.pdf?src-supplier=Mouser, ComponentLink4Description=https://datasheet.ciiva.com/25624/0900766b80f9b629-25624903.pdf?src-supplier=RSComponents, ComponentLink4URL=https://datasheet.ciiva.com/25624/0900766b80f9b629-25624903.pdf?src-supplier=RSComponents, ComponentLink5Description=https://datasheet.ciiva.com/916/s1a-916898.pdf?src-supplier=Digi-Key, ComponentLink5URL=https://datasheet.ciiva.com/916/s1a-916898.pdf?src-supplier=Digi-Key, ComponentLink6Description=https://datasheet.ciiva.com/916/s1a-916899.pdf?src-supplier=Digi-Key, ComponentLink6URL=https://datasheet.ciiva.com/916/s1a-916899.pdf?src-supplier=Digi-Key, ComponentLink7Description=https://datasheet.ciiva.com/916/s1a-916900.pdf?src-supplier=Digi-Key, ComponentLink7URL=https://datasheet.ciiva.com/916/s1a-916900.pdf?src-supplier=Digi-Key, ComponentLink8Description=https://datasheet.ciiva.com/16800/s1a-16800103.pdf?src-supplier=Future+Electronics, ComponentLink8URL=https://datasheet.ciiva.com/16800/s1a-16800103.pdf?src-supplier=Future+Electronics, ComponentLink9Description=https://datasheet.ciiva.com/28469/1766308-28469031.pdf?src-supplier=Element14, ComponentLink9URL=https://datasheet.ciiva.com/28469/1766308-28469031.pdf?src-supplier=Element14, ComponentLink10Description=https://datasheet.ciiva.com/26231/s1k-26231832.pdf?src-supplier=Avnet+Europe, ComponentLink10URL=https://datasheet.ciiva.com/26231/s1k-26231832.pdf?src-supplier=Avnet+Europe, ComponentLink11Description=https://datasheet.ciiva.com/16474/s1k-16474283.pdf?src-supplier=Avnet+Asia, ComponentLink11URL=https://datasheet.ciiva.com/16474/s1k-16474283.pdf?src-supplier=Avnet+Asia, Contact Plating=Tin, Current Rating=1A, Element Configuration=Single, Forward Current=1A, Lead Free="Lead Free", Manufacturer Part Number=S1A, Max Reverse Voltage (DC)=50V, Mount="Surface Mount", Number of Pins=2, Output Current=1A, Packaging="Tape and Reel", Peak Non-Repetitive Surge Current=30A, Polarity=Standard, Price=0.072, Pricing="5=0.184, 25=0.179, 100=0.0727, 250=0.0669, 500=0.0667, 1000=0.0364, 5000=0.0293 (EUR)", Radiation Hardening=No, REACH SVHC="No SVHC", Recovery Time=1800ns, Reverse Recovery Time=1.8us, Reverse Voltage=50V, RoHS=Yes, Stock=34555, Supplier 1=Farnell, Voltage Rating (DC)=50V, Weight=0.106g, Width=5.28mm
D2: "DIODE GEN PURP 75V 150MA SOD323F", Average Rectified Current=150mA, Forward Voltage=1V, Manufacturer="ON Semiconductor / Fairchild", Max Forward Surge Current (Ifsm)=2A, Max Operating Temperature=150°C, Max Repetitive Reverse Voltage (Vrrm)=75V, Min Operating Temperature=-55°C, Package Quantity=1, Peak Reverse Current=5uA, Power Dissipation=200mW, Supplier Part Number 1=2453269, ComponentLink1Description=https://datasheet.ciiva.com/25968/1n914bws-25968945.pdf?src-supplier=Avnet+Europe, ComponentLink1URL=https://datasheet.ciiva.com/25968/1n914bws-25968945.pdf?src-supplier=Avnet+Europe, ComponentLink2Description=https://datasheet.ciiva.com/30479/0900766b810e1cd3-30479206.pdf?src-supplier=RSComponents, ComponentLink2URL=https://datasheet.ciiva.com/30479/0900766b810e1cd3-30479206.pdf?src-supplier=RSComponents, ComponentLink3Description=https://datasheet.ciiva.com/15208/getdatasheetpartid-127819-15208358.pdf?src-supplier=Verical, ComponentLink3URL=https://datasheet.ciiva.com/15208/getdatasheetpartid-127819-15208358.pdf?src-supplier=Verical, ComponentLink4Description=https://datasheet.ciiva.com/8300/1n914bws-8300360.pdf?src-supplier=Avnet, ComponentLink4URL=https://datasheet.ciiva.com/8300/1n914bws-8300360.pdf?src-supplier=Avnet, ComponentLink5Description=https://datasheet.ciiva.com/910/1n4148ws-910380.pdf?src-supplier=Digi-Key, ComponentLink5URL=https://datasheet.ciiva.com/910/1n4148ws-910380.pdf?src-supplier=Digi-Key, ComponentLink6Description=https://datasheet.ciiva.com/910/1n4148ws-910381.pdf?src-supplier=Digi-Key, ComponentLink6URL=https://datasheet.ciiva.com/910/1n4148ws-910381.pdf?src-supplier=Digi-Key, ComponentLink7Description=https://datasheet.ciiva.com/910/1n4148ws-910382.pdf?src-supplier=Digi-Key, ComponentLink7URL=https://datasheet.ciiva.com/910/1n4148ws-910382.pdf?src-supplier=Digi-Key, Contact Plating=Tin, Element Configuration=Single, Forward Current=150mA, Height=1mm, Lead Free="Lead Free", Length=1.8mm, Manufacturer Part Number=1N4148WS, Max Reverse Voltage (DC)=75V, Mount="Surface Mount", Number of Pins=2, Packaging="Tape and Reel", Price=0.0521, Pricing="5=0.155, 25=0.151, 100=0.0529, 250=0.0498, 500=0.0477, 1000=0.0243, 5000=0.0193 (EUR)", Radiation Hardening=No, REACH SVHC="No SVHC", Recovery Time=4ns, Reverse Recovery Time=4ns, Reverse Voltage=75V, RoHS=Yes, Stock=379338, Supplier 1=Farnell, Weight=0.0276g, Width=1.35mm
DC FSW LED: "2 Pins male XH header", Price=0.1
IC1 IC2: library part TL072CDT, "IC OPAMP JFET 4MHZ 8SO", Case/Package=SOIC, Dual Supply Voltage=9V, Input Bias Current=200pA, Input Offset Voltage (Vos)=10mV, Manufacturer=STMicroelectronics, Max Dual Supply Voltage=18V, Max Operating Temperature=70°C, Max Supply Voltage=36V, Min Dual Supply Voltage=3V, Min Operating Temperature=0°C, Min Supply Voltage=6V, Nominal Supply Current=2.5mA, Operating Supply Current=1.4mA, Output Current=40mA, Package Quantity=1, Supplier Part Number 1=1467663, Voltage Gain=106.02dB, Bandwidth=4MHz, Common Mode Rejection Ratio=70dB, ComponentLink1Description=https://datasheet.ciiva.com/15129/getdatasheetpartid-40113-15129688.pdf?src-supplier=Verical, ComponentLink1URL=https://datasheet.ciiva.com/15129/getdatasheetpartid-40113-15129688.pdf?src-supplier=Verical, ComponentLink2Description=https://datasheet.ciiva.com/29306/155616-da-01-en-op-verst-tl072cdt-stm-29306849.pdf?src-supplier=Conrad, ComponentLink2URL=https://datasheet.ciiva.com/29306/155616-da-01-en-op-verst-tl072cdt-stm-29306849.pdf?src-supplier=Conrad, ComponentLink3Description=https://datasheet.ciiva.com/26847/tl072cdt-26847276.pdf?src-supplier=IIIC, ComponentLink3URL=https://datasheet.ciiva.com/26847/tl072cdt-26847276.pdf?src-supplier=IIIC, ComponentLink4Description=https://datasheet.ciiva.com/1795/cd00000490-1795664.pdf?src-supplier=Digi-Key, ComponentLink4URL=https://datasheet.ciiva.com/1795/cd00000490-1795664.pdf?src-supplier=Digi-Key, ComponentLink5Description=https://datasheet.ciiva.com/1795/cd00000490-1795665.pdf?src-supplier=Digi-Key, ComponentLink5URL=https://datasheet.ciiva.com/1795/cd00000490-1795665.pdf?src-supplier=Digi-Key, ComponentLink6Description=https://datasheet.ciiva.com/1795/cd00000490-1795666.pdf?src-supplier=Digi-Key, ComponentLink6URL=https://datasheet.ciiva.com/1795/cd00000490-1795666.pdf?src-supplier=Digi-Key, ComponentLink7Description=https://datasheet.ciiva.com/8008/1674510-8008556.pdf?src-supplier=Element14, ComponentLink7URL=https://datasheet.ciiva.com/8008/1674510-8008556.pdf?src-supplier=Element14, ComponentLink8Description=https://datasheet.ciiva.com/14151/tl072-tl072a-tl072b-st-tds-eng-14151196.pdf?src-supplier=Distrelec, ComponentLink8URL=https://datasheet.ciiva.com/14151/tl072-tl072a-tl072b-st-tds-eng-14151196.pdf?src-supplier=Distrelec, ComponentLink9Description=https://datasheet.ciiva.com/8008/1674510-8008557.pdf?src-supplier=Element14, ComponentLink9URL=https://datasheet.ciiva.com/8008/1674510-8008557.pdf?src-supplier=Element14, Contact Plating=Tin, Gain Bandwidth Product=4MHz, Height=1.25mm, Lead Free="Lead Free", Length=4.9mm, Manufacturer Part Number=TL072CDT, Mount="Surface Mount", Number of Amplifiers=2, Number of Channels=2, Number of Circuits=2, Number of Elements=2, Number of Pins=8, Operating Supply Voltage=18V, Output Current per Channel=40mA, Packaging="Tape and Reel", Price=0.351, Pricing="5=0.351, 50=0.313, 100=0.188, 500=0.167, 1000=0.145 (EUR)", Radiation Hardening=No, REACH SVHC="No SVHC", RoHS=Yes, Slew Rate=16V/µs, Stock=1760, Supplier 1=Farnell, Unity Gain Bandwidth Product=4MHz, Weight=0.01lb, Width=3.9mm
INPUT OUTPUT: "6.35mm stereo insulated socket jack PCB mounted", Price=0.5
K1: library part G6K-2F5DC, "OMRON - G6K-2F 5DC - RELAY, SIGNAL, DPDT, 30VDC, 1A", Case/Package=SMD/SMT, Coil Current=21.1mA, Coil Power=100mW, Coil Resistance=237R, Coil Voltage (DC)=5V, Contact Current Rating=1A, Contact Resistance=100mR, Insulation Resistance=1GR, Manufacturer=Cliff, Max Operating Temperature=70°C, Min Operating Temperature=-40°C, Supplier Part Number 1=4446185, Coil Type=Non-Latching, ComponentLink1Description=https://datasheet.ciiva.com/1524/1702879-1524968.pdf?src-supplier=Element14, ComponentLink1URL=https://datasheet.ciiva.com/1524/1702879-1524968.pdf?src-supplier=Element14, Contact Material=Gold, Current Rating=21.1mA, Depth=7.8mm, Height=5.2mm, Length=10mm, Manufacturer Part Number=G6K-2F5DC, Mount=PCB, Number of Poles=2, Power Rating=100mW, Price=2.68, REACH SVHC=Unknown, Release Time=1.3ms, RoHS=Yes, Stock=0, Supplier 1=Farnell, Termination=SMD/SMT, Width=10mm
K2: "Toshiba TLP175A AC Input MOSFET Output Optocoupler, Surface Mount, 4-Pin SOIC", Case/Package=SOIC, Isolation Voltage=3.75kV, Manufacturer=Toshiba, Max Input Current=80mA, Supplier Part Number 1=2524257, ComponentLink1Description=http://www.farnell.com/datasheets/2017792.pdf?src-supplier=Farnell, ComponentLink1URL=http://www.farnell.com/datasheets/2017792.pdf?src-supplier=Farnell, ComponentLink2Description=http://uk.rs-online.com/webdocs/129d/0900766b8129d5be.pdf?src-supplier=RSComponents, ComponentLink2URL=http://uk.rs-online.com/webdocs/129d/0900766b8129d5be.pdf?src-supplier=RSComponents, ComponentLink3Description=http://www.farnell.com/datasheets/2017792.pdf?src-supplier=Element14, ComponentLink3URL=http://www.farnell.com/datasheets/2017792.pdf?src-supplier=Element14, ComponentLink4Description=http://www.farnell.com/datasheets/2017792.pdf?src-supplier=Newark, ComponentLink4URL=http://www.farnell.com/datasheets/2017792.pdf?src-supplier=Newark, Fall Time=1ms, Manufacturer Part Number=TLP175A, Mount="Surface Mount", Number of Channels=1, Number of Pins=4, Price=0.829, Pricing="5=0.877, 25=0.717, 100=0.597, 250=0.546, 500=0.49, 1000=0.441 (EUR)", REACH SVHC=Unknown, Rise Time=1ms, RoHS=No, Stock=0, Supplier 1=Farnell
LEVEL: library part POT_500kB_ALPHA_16mm, "500k Lin potentiometer round shaft", Package="PCB Mounted", Dimensions=16mm, Price=0.5
MODE: "2 Pins male header", Pin spacing=2.54mm, Price=0.01
PROG: "4 Pins female header", Pin spacing=2.54mm, Price=0.01
Q1: library part MMBT2222AWT1G, "TRANS NPN 40V 0.6A SOT323", Case/Package=SC, Collector Base Voltage (VCBO)=75V, Collector Emitter Breakdown Voltage=40V, Collector Emitter Saturation Voltage=1V, Current Rating=28A, Emitter Base Voltage (VEBO)=6V, Frequency=300MHz, Manufacturer="ON Semiconductor", Max Collector Current=600mA, Max Frequency=100MHz, Max Operating Temperature=150°C, Max Power Dissipation=150mW, Min Operating Temperature=-55°C, Package Quantity=1, Supplier Part Number 1=2317589, Collector Emitter Voltage (VCEO)=40V, ComponentLink1Description=https://datasheet.ciiva.com/15139/getdatasheetpartid-76779-15139056.pdf?src-supplier=Verical, ComponentLink1URL=https://datasheet.ciiva.com/15139/getdatasheetpartid-76779-15139056.pdf?src-supplier=Verical, ComponentLink2Description=https://datasheet.ciiva.com/4722/mmbt2222awt1-d-110211-4722257.pdf?src-supplier=Mouser, ComponentLink2URL=https://datasheet.ciiva.com/4722/mmbt2222awt1-d-110211-4722257.pdf?src-supplier=Mouser, ComponentLink3Description=https://datasheet.ciiva.com/16478/mmbt2222awt1-d-16478517.pdf?src-supplier=Avnet+Asia, ComponentLink3URL=https://datasheet.ciiva.com/16478/mmbt2222awt1-d-16478517.pdf?src-supplier=Avnet+Asia, ComponentLink4Description=https://datasheet.ciiva.com/11201/mmbt2222awt1-d-11201756.pdf?src-supplier=Avnet, ComponentLink4URL=https://datasheet.ciiva.com/11201/mmbt2222awt1-d-11201756.pdf?src-supplier=Avnet, ComponentLink5Description=https://datasheet.ciiva.com/16221/mmbt2222awt1-d-16221845.pdf?src-supplier=Future+Electronics, ComponentLink5URL=https://datasheet.ciiva.com/16221/mmbt2222awt1-d-16221845.pdf?src-supplier=Future+Electronics, ComponentLink6Description=https://datasheet.ciiva.com/7972/mmbt2222awt1-d-7972374.pdf?src-supplier=Element14, ComponentLink6URL=https://datasheet.ciiva.com/7972/mmbt2222awt1-d-7972374.pdf?src-supplier=Element14, ComponentLink7Description=https://datasheet.ciiva.com/22664/1708260-22664154.pdf?src-supplier=Element14, ComponentLink7URL=https://datasheet.ciiva.com/22664/1708260-22664154.pdf?src-supplier=Element14, ComponentLink8Description=https://datasheet.ciiva.com/976/mmbt2222awt1-d-976443.pdf?src-supplier=Digi-Key, ComponentLink8URL=https://datasheet.ciiva.com/976/mmbt2222awt1-d-976443.pdf?src-supplier=Digi-Key, Contact Plating=Tin, Element Configuration=Single, Gain Bandwidth Product=300MHz, Height=1mm, hFE Min=35, Lead Free="Lead Free", Length=2.2mm, Manufacturer Part Number=MMBT2222AWT1G, Max Breakdown Voltage=40V, Number of Elements=1, Number of Pins=3, Packaging="Tape and Reel", Polarity=NPN, Power Dissipation=150mW, Price=0.0413, Pricing="5=0.118, 50=0.114, 100=0.0413, 500=0.025, 1500=0.024 (EUR)", Radiation Hardening=No, REACH SVHC="No SVHC", RoHS=Yes, Stock=16918, Supplier 1=Farnell, Transition Frequency=300MHz, Voltage Rating (DC)=40V, Width=1.35mm
R1: library part CRCW120647R0FKEA, "RES SMD 47 OHM 1% 1/4W 1206", Case/Package=1206, Case Code (Metric)=3216, Manufacturer=Vishay, Max Operating Temperature=155°C, Max Power Dissipation=250mW, Min Operating Temperature=-55°C, Package Quantity=10, Supplier Part Number 1=1470017, Temperature Coefficient=100ppm/°C, Tolerance=1%, Voltage Rating=200V, Case Code (Imperial)=1206, ComponentLink1Description=https://datasheet.ciiva.com/11818/0900766b80d98b5e-11818252.pdf?src-supplier=RSComponents, ComponentLink1URL=https://datasheet.ciiva.com/11818/0900766b80d98b5e-11818252.pdf?src-supplier=RSComponents, ComponentLink2Description=https://datasheet.ciiva.com/2469/dcrcwe3-2469056.pdf?src-supplier=Digi-Key, ComponentLink2URL=https://datasheet.ciiva.com/2469/dcrcwe3-2469056.pdf?src-supplier=Digi-Key, ComponentLink3Description=https://datasheet.ciiva.com/16760/70201119-16760313.pdf?src-supplier=Allied+Electronics, ComponentLink3URL=https://datasheet.ciiva.com/16760/70201119-16760313.pdf?src-supplier=Allied+Electronics, ComponentLink4Description=https://datasheet.ciiva.com/9005/dcrcwe3-9005498.pdf?src-supplier=Avnet, ComponentLink4URL=https://datasheet.ciiva.com/9005/dcrcwe3-9005498.pdf?src-supplier=Avnet, ComponentLink5Description=https://datasheet.ciiva.com/2469/dcrcwe3-2469054.pdf?src-supplier=Digi-Key, ComponentLink5URL=https://datasheet.ciiva.com/2469/dcrcwe3-2469054.pdf?src-supplier=Digi-Key, ComponentLink6Description=https://datasheet.ciiva.com/9005/dcrcwe3-9005502.pdf?src-supplier=Avnet, ComponentLink6URL=https://datasheet.ciiva.com/9005/dcrcwe3-9005502.pdf?src-supplier=Avnet, ComponentLink7Description=https://datasheet.ciiva.com/16435/dcrcw-16435790.pdf?src-supplier=Future+Electronics, ComponentLink7URL=https://datasheet.ciiva.com/16435/dcrcw-16435790.pdf?src-supplier=Future+Electronics, ComponentLink8Description=https://datasheet.ciiva.com/16894/dcrcwe3-16894718.pdf?src-supplier=Avnet+Europe, ComponentLink8URL=https://datasheet.ciiva.com/16894/dcrcwe3-16894718.pdf?src-supplier=Avnet+Europe, ComponentLink9Description=https://datasheet.ciiva.com/7777/1697337-7777594.pdf?src-supplier=Element14, ComponentLink9URL=https://datasheet.ciiva.com/7777/1697337-7777594.pdf?src-supplier=Element14, ComponentLink10Description=https://datasheet.ciiva.com/15159/getdatasheetpartid-67741-15159676.pdf?src-supplier=Verical, ComponentLink10URL=https://datasheet.ciiva.com/15159/getdatasheetpartid-67741-15159676.pdf?src-supplier=Verical, ComponentLink11Description=https://datasheet.ciiva.com/2469/dcrcwe3-2469055.pdf?src-supplier=Digi-Key, ComponentLink11URL=https://datasheet.ciiva.com/2469/dcrcwe3-2469055.pdf?src-supplier=Digi-Key, Composition="Thick Film", Contact Plating=Tin, Depth=1.6mm, Features="Automotive AEC-Q200", Height=0.55mm, Lead Free="Lead Free", Length=3.2mm, Manufacturer Part Number=CRCW120647R0FKEA, Military Standard=Not, Mount="Surface Mount", Number of Terminations=2, Packaging="Tape and Reel", Power Rating=250mW, Price=0.0249, Pricing="10=0.0369, 100=0.0246, 500=0.0205, 1000=0.0135, 2500=0.0108 (EUR)", Radiation Hardening=No, REACH SVHC=Unknown, Resistance=47R, RoHS=Yes, Stock=90018, Supplier 1=Farnell, Termination=SMD/SMT, Voltage Rating (DC)=200V, Weight=0.000353oz, Width=0.063inch
R2 R3: library part CRCW120647K0FKEA, "RES SMD 47K OHM 1% 1/4W 1206", Case/Package=1206, Case Code (Metric)=3216, Manufacturer=Vishay, Max Operating Temperature=155°C, Max Power Dissipation=250mW, Min Operating Temperature=-55°C, Package Quantity=10, Resistance=47kR, Supplier Part Number 1=1470016, Temperature Coefficient=100ppm/°C, Tolerance=1%, Voltage Rating=200V, Case Code (Imperial)=1206, ComponentLink1Description=https://datasheet.ciiva.com/11809/0900766b80d98b5e-11809091.pdf?src-supplier=RSComponents, ComponentLink1URL=https://datasheet.ciiva.com/11809/0900766b80d98b5e-11809091.pdf?src-supplier=RSComponents, ComponentLink2Description=https://datasheet.ciiva.com/16894/dcrcwe3-16894709.pdf?src-supplier=Avnet+Europe, ComponentLink2URL=https://datasheet.ciiva.com/16894/dcrcwe3-16894709.pdf?src-supplier=Avnet+Europe, ComponentLink3Description=https://datasheet.ciiva.com/26316/fld-crcw-e3-data-en-26316470.pdf?src-supplier=Distrelec, ComponentLink3URL=https://datasheet.ciiva.com/26316/fld-crcw-e3-data-en-26316470.pdf?src-supplier=Distrelec, ComponentLink4Description=https://datasheet.ciiva.com/7777/1697337-7777591.pdf?src-supplier=Element14, ComponentLink4URL=https://datasheet.ciiva.com/7777/1697337-7777591.pdf?src-supplier=Element14, ComponentLink5Description=https://datasheet.ciiva.com/7777/125364-7777592.pdf?src-supplier=Element14, ComponentLink5URL=https://datasheet.ciiva.com/7777/125364-7777592.pdf?src-supplier=Element14, ComponentLink6Description=https://datasheet.ciiva.com/16380/dcrcwe3-16380760.pdf?src-supplier=Future+Electronics, ComponentLink6URL=https://datasheet.ciiva.com/16380/dcrcwe3-16380760.pdf?src-supplier=Future+Electronics, ComponentLink7Description=https://datasheet.ciiva.com/2468/dcrcwe3-2468922.pdf?src-supplier=Digi-Key, ComponentLink7URL=https://datasheet.ciiva.com/2468/dcrcwe3-2468922.pdf?src-supplier=Digi-Key, ComponentLink8Description=https://datasheet.ciiva.com/2468/dcrcwe3-2468923.pdf?src-supplier=Digi-Key, ComponentLink8URL=https://datasheet.ciiva.com/2468/dcrcwe3-2468923.pdf?src-supplier=Digi-Key, ComponentLink9Description=https://datasheet.ciiva.com/2468/dcrcwe3-2468924.pdf?src-supplier=Digi-Key, ComponentLink9URL=https://datasheet.ciiva.com/2468/dcrcwe3-2468924.pdf?src-supplier=Digi-Key, ComponentLink10Description=https://datasheet.ciiva.com/7777/1697337-7777484.pdf?src-supplier=Element14, ComponentLink10URL=https://datasheet.ciiva.com/7777/1697337-7777484.pdf?src-supplier=Element14, ComponentLink11Description=https://datasheet.ciiva.com/22868/70201119-22868605.pdf?src-supplier=Allied+Electronics, ComponentLink11URL=https://datasheet.ciiva.com/22868/70201119-22868605.pdf?src-supplier=Allied+Electronics, ComponentLink12Description=https://datasheet.ciiva.com/9006/dcrcwe3-9006431.pdf?src-supplier=Avnet, ComponentLink12URL=https://datasheet.ciiva.com/9006/dcrcwe3-9006431.pdf?src-supplier=Avnet, Composition="Thick Film", Contact Plating=Tin, Depth=1.6mm, Features="Automotive AEC-Q200", Height=0.55mm, Lead Free="Lead Free", Length=3.2mm, Manufacturer Part Number=CRCW120647K0FKEA, Military Standard=Not, Number of Terminations=2, Packaging="Tape and Reel", Power Rating=250mW, Price=0.028, Pricing="10=0.0415, 100=0.0276, 500=0.0231, 1000=0.0135, 2500=0.0116 (EUR)", Radiation Hardening=No, REACH SVHC=Unknown, RoHS=Yes, Stock=31528, Supplier 1=Farnell, Termination=SMD/SMT, Voltage Rating (DC)=200V, Weight=0.000353oz, Width=1.6mm